# EAGLE board 23b_clock (EAGLE 5.11)

Size 203.2 x 203.2 mm. Coordinates in mm from the lower left corner, seen from the top.
Outline: circle at 101.6,101.6 radius 101.6
Copper layers (1*16): Top 0.035mm / dielectric 1.5mm / Bottom 0.035mm
Design rules "default": minimum track width 10mil, minimum drill 24mil, track to track 8mil, track to pad 8mil, pad to pad 8mil, via to via 8mil, smd to smd 8mil, copper to edge 40mil, drill to drill 8mil, minimum pad ring 10mil, minimum via ring 8mil, stop-mask expansion 4mil, vias tented up to drill 0mil, thermal gap 10mil

## Footprints (pad centres in the part's own frame; a part is rotated, then mirrored left to right if it is on the bottom)
0805 = smd 0.8 x 1.2: 1 -0.9,0; 2 0.9,0
QFN32_XLP = smd 0.285 x 0.8: 1 -1.75,-2.5; 2 -1.25,-2.5; 3 -0.75,-2.5; 4 -0.25,-2.5; 5 0.25,-2.5; 6 0.75,-2.5; 7 1.25,-2.5; 8 1.75,-2.5; 17 1.75,2.5; 18 1.25,2.5; 19 0.75,2.5; 20 0.25,2.5; 21 -0.25,2.5; 22 -0.75,2.5; 23 -1.25,2.5; 24 -1.75,2.5 | smd 0.8 x 0.285: 9 2.5,-1.75; 10 2.5,-1.25; 11 2.5,-0.75; 12 2.5,-0.25; 13 2.5,0.25; 14 2.5,0.75; 15 2.5,1.25; 16 2.5,1.75; 25 -2.5,1.75; 26 -2.5,1.25; 27 -2.5,0.75; 28 -2.5,0.25; 29 -2.5,-0.25; 30 -2.5,-0.75; 31 -2.5,-1.25; 32 -2.5,-1.75 | smd 3.15 x 3.15: EP 0,0
TQFP32-08 = smd 1.27 x 0.559: 1 -4.293,2.8; 2 -4.293,2; 3 -4.293,1.2; 4 -4.293,0.4; 5 -4.293,-0.4; 6 -4.293,-1.2; 7 -4.293,-2; 8 -4.293,-2.8; 17 4.293,-2.8; 18 4.293,-2; 19 4.293,-1.2; 20 4.293,-0.4; 21 4.293,0.4; 22 4.293,1.2; 23 4.293,2; 24 4.293,2.8 | smd 0.559 x 1.27: 9 -2.8,-4.293; 10 -2,-4.293; 11 -1.2,-4.293; 12 -0.4,-4.293; 13 0.4,-4.293; 14 1.2,-4.293; 15 2,-4.293; 16 2.8,-4.293; 25 2.8,4.293; 26 2,4.293; 27 1.2,4.293; 28 0.4,4.293; 29 -0.4,4.293; 30 -1.2,4.293; 31 -2,4.293; 32 -2.8,4.293
1X6_FINE = drill 0.508 pad 1 round: 1 0,0; 2 1.27,0; 3 2.54,0; 4 3.81,0; 5 5.08,0; 6 6.35,0
1X01_LONGPAD = drill 1.118 pad 1.88 long: 1 0,0
LED5MM = drill 0.813 octagon: A -1.27,0; K 1.27,0
R0805 = smd 1.3 x 1.5: 1 -0.95,0; 2 0.95,0
TACTILE_SWITCH_SMD = smd 1.524 x 0.762: 1 -2.54,1.905; 2 2.54,1.905; 3 -2.54,-1.905; 4 2.54,-1.905
MA06-1 = drill 1.016 long: 1 -6.35,0; 2 -3.81,0; 3 -1.27,0; 4 1.27,0; 5 3.81,0; 6 6.35,0
5032 = smd 2.286 x 2.032: 1 -2.413,0; 2 2.413,0

## Placement (x,y rotation side)
C1  .1uF  [0805]  83.82,110.49 0 top
C2  .1uF  [0805]  77.47,123.19 0 top
C3  18pF  [0805]  87.63,120.65 0 top
C4  18pF  [0805]  90.17,101.6 180 top
IC1  TLC5947XLP  [QFN32_XLP]  110.49,128.27 90 top
IC2  MEGA8-AI  [TQFP32-08]  101.6,101.6 0 top
IC3  TLC5947XLP  [QFN32_XLP]  66.04,90.17 90 top
IC4  TLC5947XLP  [QFN32_XLP]  116.84,87.63 0 top
INPUT  1X6_FINE  [1X6_FINE]  134.62,125.73 90 top
JP1  M01PTH_LONGPAD  [1X01_LONGPAD]  152.4,101.6 0 top
JP2  M01PTH_LONGPAD  [1X01_LONGPAD]  152.12,106.91 6 top
JP3  M01PTH_LONGPAD  [1X01_LONGPAD]  151.29,112.16 12 top
JP4  M01PTH_LONGPAD  [1X01_LONGPAD]  149.91,117.3 18 top
JP5  M01PTH_LONGPAD  [1X01_LONGPAD]  148.01,122.26 24 top
JP6  M01PTH_LONGPAD  [1X01_LONGPAD]  145.6,127 30 top
JP7  M01PTH_LONGPAD  [1X01_LONGPAD]  142.7,131.46 36 top
JP8  M01PTH_LONGPAD  [1X01_LONGPAD]  139.35,135.59 42 top
JP9  M01PTH_LONGPAD  [1X01_LONGPAD]  135.59,139.35 48 top
JP10  M01PTH_LONGPAD  [1X01_LONGPAD]  131.46,142.7 54 top
JP11  M01PTH_LONGPAD  [1X01_LONGPAD]  127,145.6 60 top
JP12  M01PTH_LONGPAD  [1X01_LONGPAD]  122.26,148.01 66 top
JP13  M01PTH_LONGPAD  [1X01_LONGPAD]  117.3,149.91 72 top
JP14  M01PTH_LONGPAD  [1X01_LONGPAD]  112.16,151.29 78 top
JP15  M01PTH_LONGPAD  [1X01_LONGPAD]  106.91,152.12 84 top
JP16  M01PTH_LONGPAD  [1X01_LONGPAD]  101.6,152.4 90 top
JP17  M01PTH_LONGPAD  [1X01_LONGPAD]  96.29,152.12 96 top
JP18  M01PTH_LONGPAD  [1X01_LONGPAD]  91.04,151.29 102 top
JP19  M01PTH_LONGPAD  [1X01_LONGPAD]  85.9,149.91 108 top
JP20  M01PTH_LONGPAD  [1X01_LONGPAD]  80.94,148.01 114 top
JP21  M01PTH_LONGPAD  [1X01_LONGPAD]  76.2,145.6 120 top
JP22  M01PTH_LONGPAD  [1X01_LONGPAD]  71.74,142.7 126 top
JP23  M01PTH_LONGPAD  [1X01_LONGPAD]  67.61,139.35 132 top
JP24  M01PTH_LONGPAD  [1X01_LONGPAD]  63.85,135.59 138 top
JP25  M01PTH_LONGPAD  [1X01_LONGPAD]  60.5,131.46 144 top
JP26  M01PTH_LONGPAD  [1X01_LONGPAD]  57.6,127 150 top
JP27  M01PTH_LONGPAD  [1X01_LONGPAD]  55.19,122.26 156 top
JP28  M01PTH_LONGPAD  [1X01_LONGPAD]  53.29,117.3 162 top
JP29  M01PTH_LONGPAD  [1X01_LONGPAD]  51.91,112.16 168 top
JP30  M01PTH_LONGPAD  [1X01_LONGPAD]  51.08,106.91 174 top
JP31  M01PTH_LONGPAD  [1X01_LONGPAD]  50.8,101.6 180 top
JP32  M01PTH_LONGPAD  [1X01_LONGPAD]  51.08,96.29 186 top
JP33  M01PTH_LONGPAD  [1X01_LONGPAD]  51.91,91.04 192 top
JP34  M01PTH_LONGPAD  [1X01_LONGPAD]  53.29,85.9 198 top
JP35  M01PTH_LONGPAD  [1X01_LONGPAD]  55.19,80.94 204 top
JP36  M01PTH_LONGPAD  [1X01_LONGPAD]  57.6,76.2 210 top
JP37  M01PTH_LONGPAD  [1X01_LONGPAD]  60.5,71.74 216 top
JP38  M01PTH_LONGPAD  [1X01_LONGPAD]  63.85,67.61 222 top
JP39  M01PTH_LONGPAD  [1X01_LONGPAD]  67.61,63.85 228 top
JP40  M01PTH_LONGPAD  [1X01_LONGPAD]  71.74,60.5 234 top
JP41  M01PTH_LONGPAD  [1X01_LONGPAD]  76.2,57.6 240 top
JP42  M01PTH_LONGPAD  [1X01_LONGPAD]  80.94,55.19 246 top
JP43  M01PTH_LONGPAD  [1X01_LONGPAD]  85.9,53.29 252 top
JP44  M01PTH_LONGPAD  [1X01_LONGPAD]  91.04,51.91 258 top
JP45  M01PTH_LONGPAD  [1X01_LONGPAD]  96.29,51.08 264 top
JP46  M01PTH_LONGPAD  [1X01_LONGPAD]  101.6,50.8 270 top
JP47  M01PTH_LONGPAD  [1X01_LONGPAD]  106.91,51.08 276 top
JP48  M01PTH_LONGPAD  [1X01_LONGPAD]  112.16,51.91 282 top
JP49  M01PTH_LONGPAD  [1X01_LONGPAD]  117.3,53.29 288 top
JP50  M01PTH_LONGPAD  [1X01_LONGPAD]  122.26,55.19 294 top
JP51  M01PTH_LONGPAD  [1X01_LONGPAD]  127,57.6 300 top
JP52  M01PTH_LONGPAD  [1X01_LONGPAD]  131.46,60.5 306 top
JP53  M01PTH_LONGPAD  [1X01_LONGPAD]  135.59,63.85 312 top
JP54  M01PTH_LONGPAD  [1X01_LONGPAD]  139.35,67.61 318 top
JP55  M01PTH_LONGPAD  [1X01_LONGPAD]  142.7,71.74 324 top
JP56  M01PTH_LONGPAD  [1X01_LONGPAD]  145.6,76.2 330 top
JP57  M01PTH_LONGPAD  [1X01_LONGPAD]  148.01,80.94 336 top
JP58  M01PTH_LONGPAD  [1X01_LONGPAD]  149.91,85.9 342 top
JP59  M01PTH_LONGPAD  [1X01_LONGPAD]  151.29,91.04 348 top
JP60  M01PTH_LONGPAD  [1X01_LONGPAD]  152.12,96.29 354 top
LED1  [LED5MM]  198.12,101.6 180 top
LED2  [LED5MM]  197.59,111.69 186 top
LED3  [LED5MM]  196.01,121.67 192 top
LED4  [LED5MM]  193.4,131.43 198 top
LED5  [LED5MM]  189.78,140.86 204 top
LED6  [LED5MM]  185.19,149.86 210 top
LED7  [LED5MM]  179.69,158.33 216 top
LED8  [LED5MM]  173.33,166.18 222 top
LED9  [LED5MM]  166.18,173.33 228 top
LED10  [LED5MM]  158.33,179.69 234 top
LED11  [LED5MM]  149.86,185.19 240 top
LED12  [LED5MM]  140.86,189.78 246 top
LED13  [LED5MM]  131.43,193.4 252 top
LED14  [LED5MM]  121.67,196.01 258 top
LED15  [LED5MM]  111.69,197.59 264 top
LED16  [LED5MM]  101.6,198.12 270 top
LED17  [LED5MM]  91.51,197.59 276 top
LED18  [LED5MM]  81.53,196.01 282 top
LED19  [LED5MM]  71.77,193.4 288 top
LED20  [LED5MM]  62.34,189.78 294 top
LED21  [LED5MM]  53.34,185.19 300 top
LED22  [LED5MM]  44.87,179.69 306 top
LED23  [LED5MM]  37.02,173.33 312 top
LED24  [LED5MM]  29.87,166.18 318 top
LED25  [LED5MM]  23.51,158.33 324 top
LED26  [LED5MM]  18.01,149.86 330 top
LED27  [LED5MM]  13.42,140.86 336 top
LED28  [LED5MM]  9.8,131.43 342 top
LED29  [LED5MM]  7.19,121.67 348 top
LED30  [LED5MM]  5.61,111.69 354 top
LED31  [LED5MM]  5.08,101.6 0 top
LED32  [LED5MM]  5.61,91.51 6 top
LED33  [LED5MM]  7.19,81.53 12 top
LED34  [LED5MM]  9.8,71.77 18 top
LED35  [LED5MM]  13.42,62.34 24 top
LED36  [LED5MM]  18.01,53.34 30 top
LED37  [LED5MM]  23.51,44.87 36 top
LED38  [LED5MM]  29.87,37.02 42 top
LED39  [LED5MM]  37.02,29.87 48 top
LED40  [LED5MM]  44.87,23.51 54 top
LED41  [LED5MM]  53.34,18.01 60 top
LED42  [LED5MM]  62.34,13.42 66 top
LED43  [LED5MM]  71.77,9.8 72 top
LED44  [LED5MM]  81.53,7.19 78 top
LED45  [LED5MM]  91.51,5.61 84 top
LED46  [LED5MM]  101.6,5.08 90 top
LED47  [LED5MM]  111.69,5.61 96 top
LED48  [LED5MM]  121.67,7.19 102 top
LED49  [LED5MM]  131.43,9.8 108 top
LED50  [LED5MM]  140.86,13.42 114 top
LED51  [LED5MM]  149.86,18.01 120 top
LED52  [LED5MM]  158.33,23.51 126 top
LED53  [LED5MM]  166.18,29.87 132 top
LED54  [LED5MM]  173.33,37.02 138 top
LED55  [LED5MM]  179.69,44.87 144 top
LED56  [LED5MM]  185.19,53.34 150 top
LED57  [LED5MM]  189.78,62.34 180 top
LED58  [LED5MM]  193.4,71.77 180 top
LED59  [LED5MM]  196.01,81.53 180 top
LED60  [LED5MM]  197.59,91.51 174 top
OUTPUT  1X6_FINE  [1X6_FINE]  139.7,125.73 90 top
R1  20K  [R0805]  73.66,106.68 0 top
R2  20K  [R0805]  73.66,104.14 0 top
R3  20K  [R0805]  73.66,88.9 0 top
S1  [TACTILE_SWITCH_SMD]  124.46,104.14 0 top
S2  [TACTILE_SWITCH_SMD]  124.46,115.57 180 top
SV1  [MA06-1]  115.57,100.33 90 top
X1  16Mhz  [5032]  92.71,95.25 180 top

## Library data of the parts
C1-C4 IC1 IC3 IC4 INPUT OUTPUT = slice_noshift
IC2 = atmel; MPN: ATMEGA8-16AU; OC_FARNELL: 9171371; OC_NEWARK: 73M8863
JP1-JP60 S1 S2 = SparkFun
LED1-LED60 = led
R1-R3 = rcl
SV1 = NSL
X1 = NSL_MiniQuad

## Nets
!CS: IC2.14
BLANK: IC1.30 IC2.25 IC3.30 IC4.30 INPUT.5 OUTPUT.5
BUTTON: IC2.28 S2.3
COL1: IC1.1 JP1.1 LED1.K
COL2: IC1.2 JP2.1 LED2.K
COL3: IC1.3 JP3.1 LED3.K
COL4: IC1.4 JP4.1 LED4.K
COL5: IC1.5 JP5.1 LED5.K
COL6: IC1.6 JP6.1 LED6.K
COL7: IC1.7 JP7.1 LED7.K
COL8: IC1.8 JP8.1 LED8.K
COL9: IC1.9 JP9.1 LED9.K
COL10: IC1.10 JP10.1 LED10.K
COL11: IC1.11 JP11.1 LED11.K
COL12: IC1.12 JP12.1 LED12.K
COL13: IC1.13 JP13.1 LED13.K
COL14: IC1.14 JP14.1 LED14.K
COL15: IC1.15 JP15.1 LED15.K
COL16: IC1.16 JP16.1 LED16.K
COL17: IC1.17 JP17.1 LED17.K
COL18: IC1.18 JP18.1 LED18.K
COL19: IC1.19 JP19.1 LED19.K
COL20: IC1.20 JP20.1 LED20.K
COL21: IC1.21 JP21.1 LED21.K
COL22: IC1.22 JP22.1 LED22.K
COL23: IC1.23 JP23.1 LED23.K
COL24: IC1.24 JP24.1 LED24.K
COL25: IC3.1 JP25.1 LED25.K
COL26: IC3.2 JP26.1 LED26.K
COL27: IC3.3 JP27.1 LED27.K
COL28: IC3.4 JP28.1 LED28.K
COL29: IC3.5 JP29.1 LED29.K
COL30: IC3.6 JP30.1 LED30.K
COL31: IC3.7 JP31.1 LED31.K
COL32: IC3.8 JP32.1 LED32.K
COL33: IC3.9 JP33.1 LED33.K
COL34: IC3.10 JP34.1 LED34.K
COL35: IC3.11 JP35.1 LED35.K
COL36: IC3.12 JP36.1 LED36.K
COL37: IC3.13 JP37.1 LED37.K
COL38: IC3.14 JP38.1 LED38.K
COL39: IC3.15 JP39.1 LED39.K
COL40: IC3.16 JP40.1 LED40.K
COL41: IC3.17 JP41.1 LED41.K
COL42: IC3.18 JP42.1 LED42.K
COL43: IC3.19 JP43.1 LED43.K
COL44: IC3.20 JP44.1 LED44.K
COL45: IC3.21 JP45.1 LED45.K
COL46: IC3.22 JP46.1 LED46.K
COL47: IC3.23 JP47.1 LED47.K
COL48: IC3.24 JP48.1 LED48.K
COL49: IC4.1 JP49.1 LED49.K
COL50: IC4.2 JP50.1 LED50.K
COL51: IC4.3 JP51.1 LED51.K
COL52: IC4.4 JP52.1 LED52.K
COL53: IC4.5 JP53.1 LED53.K
COL54: IC4.6 JP54.1 LED54.K
COL55: IC4.7 JP55.1 LED55.K
COL56: IC4.8 JP56.1 LED56.K
COL57: IC4.9 JP57.1 LED57.K
COL58: IC4.10 JP58.1 LED58.K
COL59: IC4.11 JP59.1 LED59.K
COL60: IC4.12 JP60.1 LED60.K
GND: C1.2 C2.2 C3.2 C4.2 IC1.29 IC2.3 IC2.5 IC2.21 IC3.29 IC4.29 INPUT.1 OUTPUT.1 R1.1 R2.1 R3.1 S1.1 S1.2 S2.1 S2.2 SV1.6
INT1/DRDY: IC2.13
INT2: IC2.12
MIC: IC2.1
MISO: IC2.16 SV1.2
MOSI: IC2.15 SV1.1
N$1: IC3.27 R2.2
N$7: C3.1 IC2.7 X1.2
N$8: C4.1 IC2.8 X1.1
N$13: IC1.27 R1.2
N$30: IC4.13
N$31: IC4.14
N$32: IC4.15
N$33: IC4.16
N$34: IC4.24
N$35: IC4.23
N$36: IC4.22
N$37: IC4.21
N$38: IC4.17
N$39: IC4.18
N$40: IC4.19
N$41: IC4.20
N$64: IC4.27 R3.2
RST: IC2.29 S1.3 SV1.5
RX: IC2.30
SCK: IC2.17 SV1.3
SCL/SPC: IC2.10
SCLK: IC1.31 IC2.24 IC3.31 IC4.31 INPUT.4 OUTPUT.4
SDA/SDI/SDO: IC2.11
SDO: IC2.9
SIN: IC1.32 IC2.23 INPUT.2
SOUT: IC1.25 IC3.32 OUTPUT.2
SOUT_2: IC3.25 IC4.32
STAT: IC2.27
TX: IC2.31
VCC: C1.1 C2.1 IC1.28 IC2.4 IC2.6 IC2.18 IC2.20 IC3.28 IC4.28 INPUT.3 LED1.A LED2.A LED3.A LED4.A LED5.A LED6.A LED7.A LED8.A LED9.A LED10.A LED11.A LED12.A LED13.A LED14.A LED15.A LED16.A LED17.A LED18.A LED19.A LED20.A LED21.A LED22.A LED23.A LED24.A LED25.A LED26.A LED27.A LED28.A LED29.A LED30.A LED31.A LED32.A LED33.A LED34.A LED35.A LED36.A LED37.A LED38.A LED39.A LED40.A LED41.A LED42.A LED43.A LED44.A LED45.A LED46.A LED47.A LED48.A LED49.A LED50.A LED51.A LED52.A LED53.A LED54.A LED55.A LED56.A LED57.A LED58.A LED59.A LED60.A OUTPUT.3 SV1.4
XLAT: IC1.26 IC2.26 IC3.26 IC4.26 INPUT.6 OUTPUT.6

## Tracks (layer width: path | path; a pad name or v marks a point on that pad's centre or on a via)
BLANK  (5 unrouted)
BUTTON  (1 unrouted)
COL1  (2 unrouted)
COL2  (2 unrouted)
COL3  (2 unrouted)
COL4  (2 unrouted)
COL5  (2 unrouted)
COL6  (2 unrouted)
COL7  (2 unrouted)
COL8  (2 unrouted)
COL9  (2 unrouted)
COL10  (2 unrouted)
COL11  (2 unrouted)
COL12  (2 unrouted)
COL13  (2 unrouted)
COL14  (2 unrouted)
COL15  (2 unrouted)
COL16  (2 unrouted)
COL17  (2 unrouted)
COL18  (2 unrouted)
COL19  (2 unrouted)
COL20  (2 unrouted)
COL21  (2 unrouted)
COL22  (2 unrouted)
COL23  (2 unrouted)
COL24  (2 unrouted)
COL25  (2 unrouted)
COL26  (2 unrouted)
COL27  (2 unrouted)
COL28  (2 unrouted)
COL29  (2 unrouted)
COL30  (2 unrouted)
COL31  (2 unrouted)
COL32  (2 unrouted)
COL33  (2 unrouted)
COL34  (2 unrouted)
COL35  (2 unrouted)
COL36  (2 unrouted)
COL37  (2 unrouted)
COL38  (2 unrouted)
COL39  (2 unrouted)
COL40  (2 unrouted)
COL41  (2 unrouted)
COL42  (2 unrouted)
COL43  (2 unrouted)
COL44  (2 unrouted)
COL45  (2 unrouted)
COL46  (2 unrouted)
COL47  (2 unrouted)
COL48  (2 unrouted)
COL49  (2 unrouted)
COL50  (2 unrouted)
COL51  (2 unrouted)
COL52  (2 unrouted)
COL53  (2 unrouted)
COL54  (2 unrouted)
COL55  (2 unrouted)
COL56  (2 unrouted)
COL57  (2 unrouted)
COL58  (2 unrouted)
COL59  (2 unrouted)
COL60  (2 unrouted)
GND  (19 unrouted)
MISO  (1 unrouted)
MOSI  (1 unrouted)
N$1  (1 unrouted)
N$7  (2 unrouted)
N$8  (2 unrouted)
N$13  (1 unrouted)
N$64  (1 unrouted)
RST  (2 unrouted)
SCK  (1 unrouted)
SCLK  (5 unrouted)
SIN  (2 unrouted)
SOUT  (2 unrouted)
SOUT_2  (1 unrouted)
VCC  (71 unrouted)
XLAT  (5 unrouted)